# EAGLE board Analog_2 (EAGLE 8.2.1)
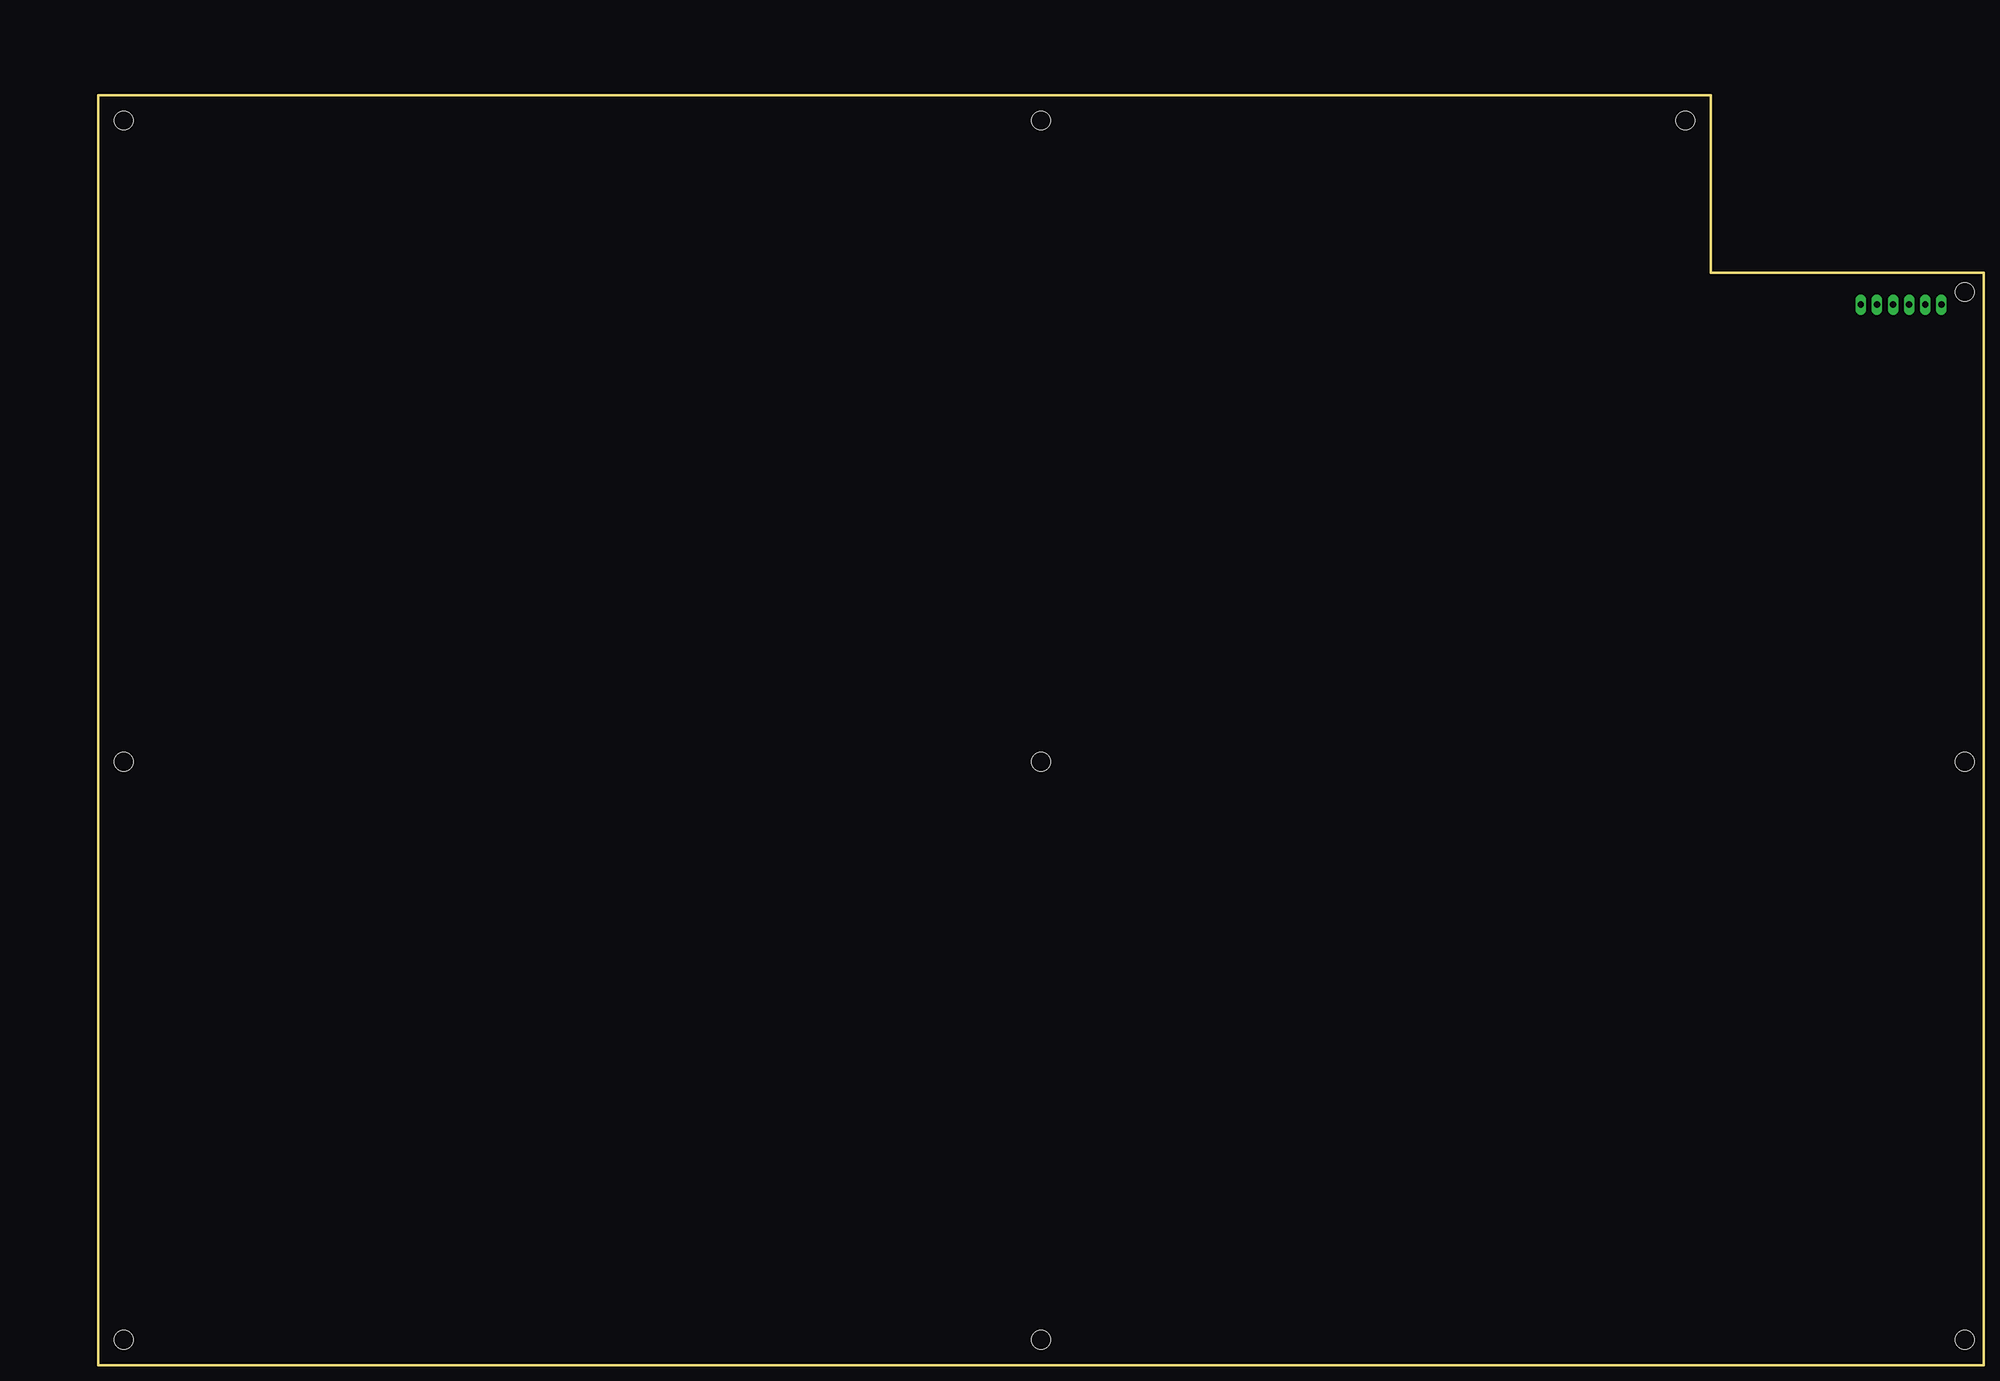
[diagram p0: board, top side]
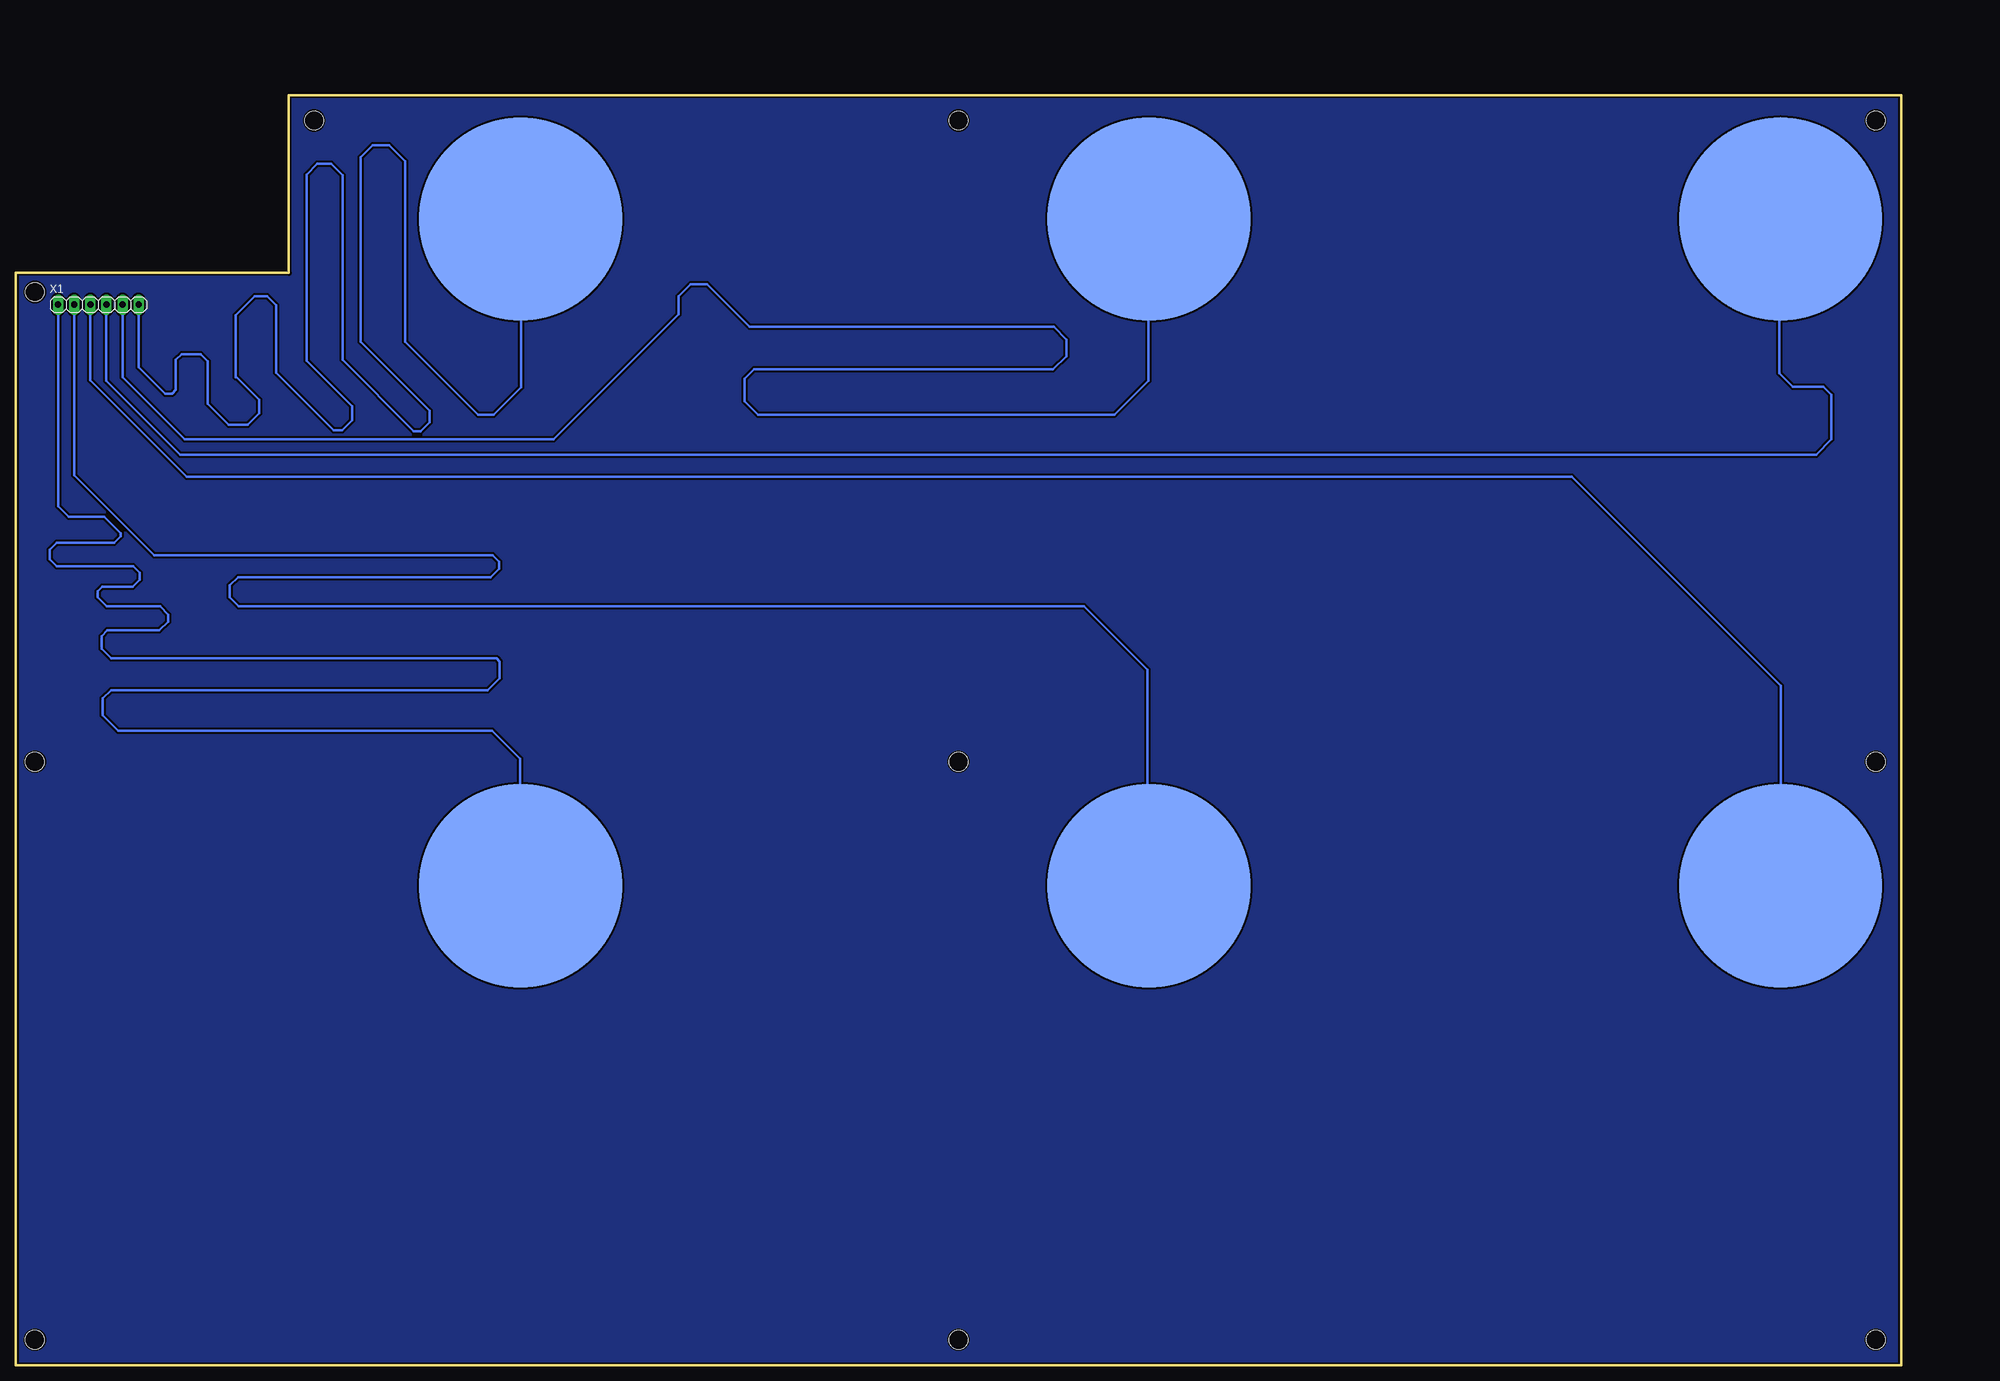
[diagram p1: board, bottom side, seen from below]

Size 297 x 200 mm. Coordinates in mm from the lower left corner, seen from the top.
Outline: 0,0 0,200 254,200 254,172 297,172 297,0 0,0
Copper layers 16: Bottom 0.105mm
Design rules "eC_1Layer_PClass3_BaseCopperO105 *": minimum track width 0.25mm, minimum drill 0.35mm, track to track 0.3mm, track to pad 0.3mm, pad to pad 0.3mm, via to via 0.3mm, smd to smd 0mil, copper to edge 0.25mm, drill to drill 0.35mm, minimum pad ring 0.3mm, minimum via ring 0.3mm, stop-mask expansion 0mil, vias tented up to drill 0.45mm, thermal gap 0.2mm
Holes 3 mm at 4,196 4,4 294,4 294,169 250,196 4,95 294,95 148.5,4 148.5,196 148.5,95

## Footprints (pad centres in the part's own frame; a part is rotated, then mirrored left to right if it is on the bottom)
PAD = smd 32 x 32: P$1 0,0
1X06 = drill 1.016 long: 1 -6.35,0; 2 -3.81,0; 3 -1.27,0; 4 1.27,0; 5 3.81,0; 6 6.35,0

## Placement (x,y rotation side)
1  [PAD]  19,75.5 180 bottom
E$1  [PAD]  19,180.5 180 bottom
E$3  [PAD]  118.5,75.5 180 bottom
E$4  [PAD]  118.5,180.5 180 bottom
E$5  [PAD]  217.5,75.5 180 bottom
E$6  [PAD]  217.5,180.5 180 bottom
X1  [1X06]  284,167 0 bottom

## Library data of the parts
1 E$1 E$3-E$6 = pad
X1 = pinhead

## Nets
S$1: 1.P$1

## Tracks (layer width: path | path; a pad name or v marks a point on that pad's centre or on a via)
S$1
  Bottom 0.406: 1.P$1 19,107 51.9,139.9 270.1,139.9 285.28,155.08 285.28,167.04
S$2
  Bottom 0.406: 118.7,75.6 118.7,109.5 128.7,119.5 261.9,119.5 263.3,120.9 263.3,122.8 262,124.1 222.2,124.1 220.9,125.4 220.9,126.5 221.9,127.5 275.2,127.5 287.8,140.1 287.8,167
S$3
  Bottom 0.406: 217.6,75.6 217.6,95.5 222,99.9 280.9,99.9 283.3,102.3 283.3,105 282,106.3 222.7,106.3 220.8,108.2 220.8,110.8 221.3,111.3 282,111.3 283.5,112.8 283.5,114.8 282.6,115.7 274.4,115.7 273,117.1 273,118.2 274.3,119.5 282.7,119.5 284.1,120.9 284.1,121.9 283.4,122.6 278.6,122.6 277.5,123.7 277.5,124.8 278.5,125.8 290.6,125.8 291.7,126.9 291.7,128.4 290.6,129.5 281.5,129.5 280.5,130.5 280.5,131 283.1,133.6 288.7,133.6 290.33,135.23 290.33,167.01
S$4
  Bottom 0.406: 118.6,180.5 118.6,155 123.9,149.7 180.1,149.7 182.2,151.8 182.2,155.3 180.7,156.8 133.6,156.8 131.5,158.9 131.5,161.5 133.5,163.5 181.4,163.5 188.1,170.2 190.7,170.2 192.6,168.3 192.6,165.5 212.3,145.8 270.4,145.8 280.2,155.6 280.2,167
S$5
  Bottom 0.406: 19.2,179.5 19.2,156.2 17.1,154.1 12.3,154.1 11,152.8 11,145.8 13.4,143.4 271.1,143.4 282.75,155.05 282.75,166.99
S$6
  Bottom 0.406: 217.4,180.6 217.4,154 221.7,149.7 224.2,149.7 235.7,161.2 235.7,189.6 238.2,192.1 240.8,192.1 242.7,190.2 242.7,161.2 231.8,150.3 231.8,148.5 233.2,147.1 234.3,147.1 245.5,158.3 245.5,187.4 247.3,189.2 249.5,189.2 251.2,187.5 251.2,158.2 244,151 244,148.8 245.6,147.2 246.9,147.2 256,156.3 256,166.9 257.4,168.3 259.4,168.3 262.4,165.3 262.4,155.7 | 262.4,155.7 262.4,155.6 | 262.4,155.7 258.7,152 258.7,149.9 260.5,148.1 263.5,148.1 266.8,151.4 266.8,158.1 267.9,159.2 270.9,159.2 271.8,158.3 271.8,153.6 272.4,153 273.5,153 277.65,157.15 277.65,167.03
S$7
  pour Bottom: 0,200 254,200 254,172 297,172 297,0 0,0